# EAGLE board Relay shield (EAGLE 5.10)
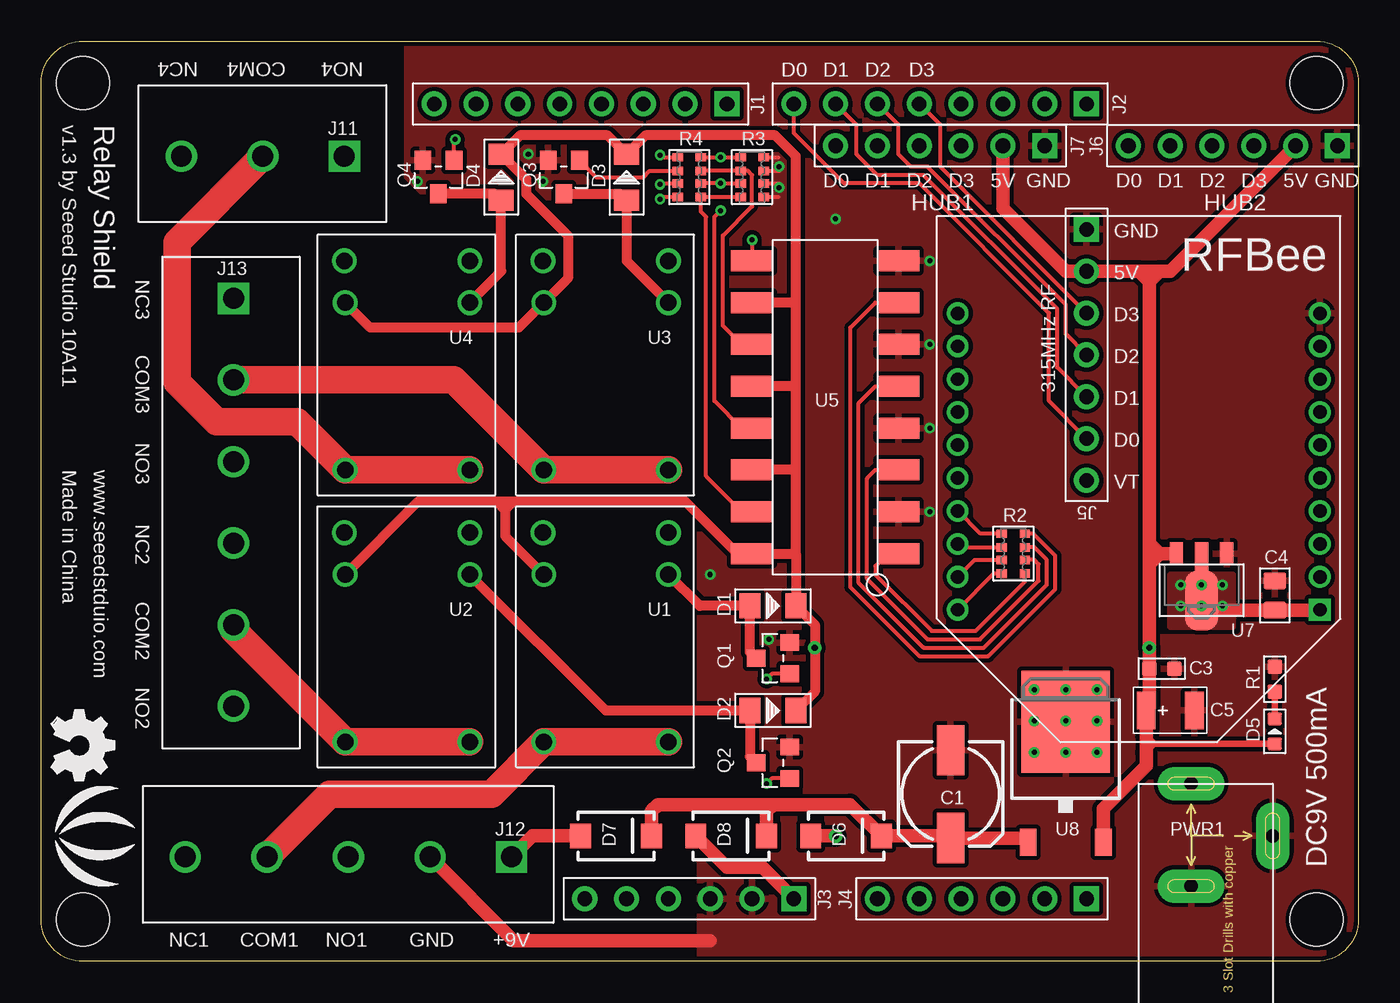
[diagram p0: board, top side]
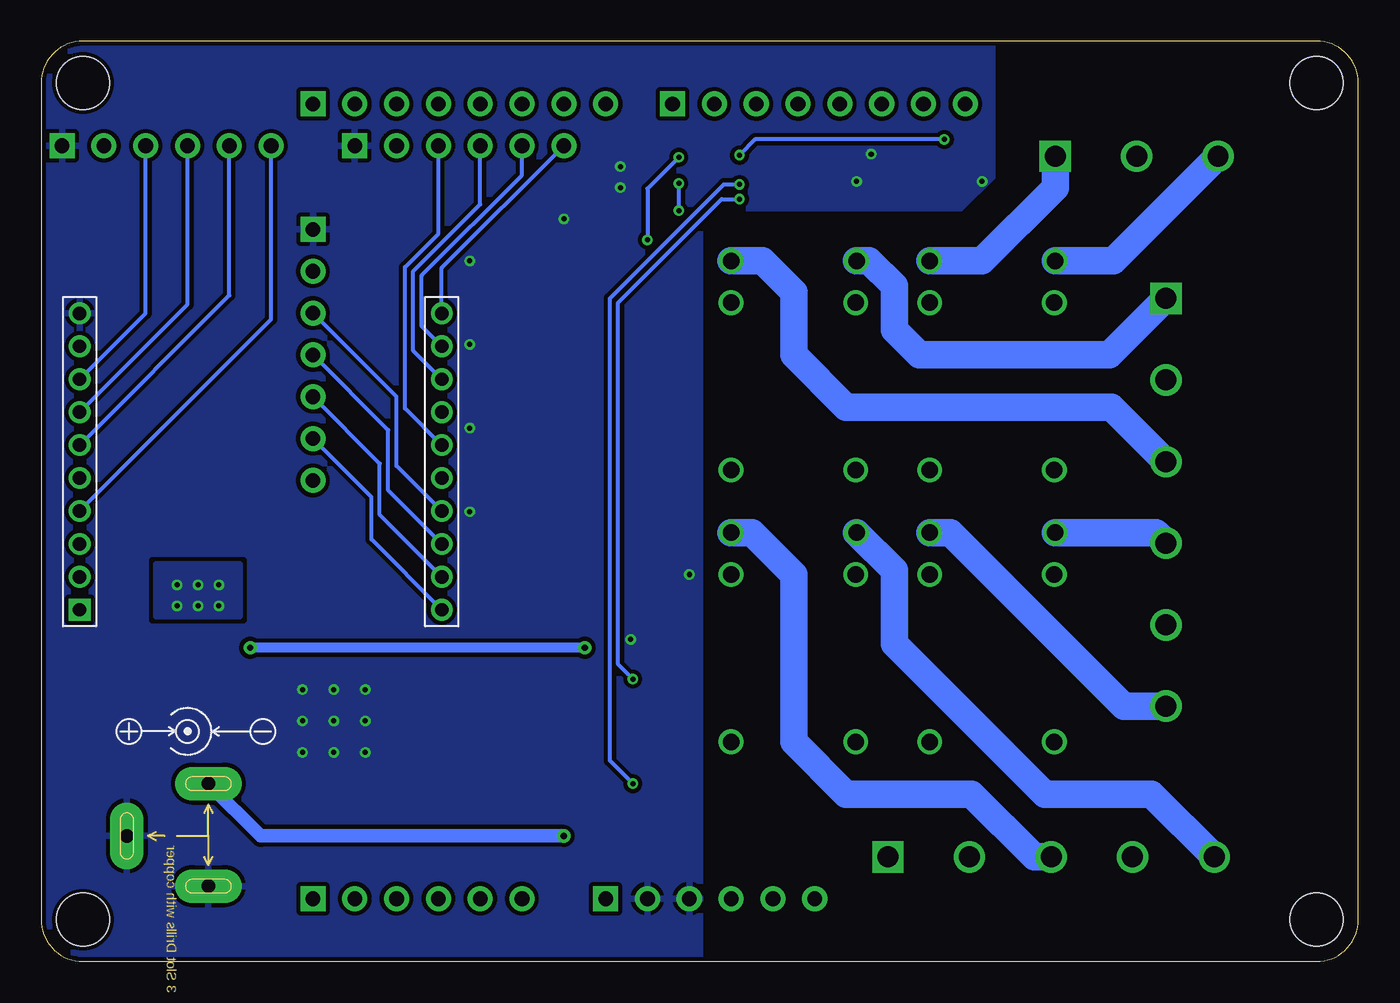
[diagram p1: board, bottom side, seen from below]

Size 80.01 x 55.88 mm. Coordinates in mm from the lower left corner, seen from the top.
Outline: 2.54,55.88 77.47,55.88 arc-90 80.01,53.34 80.01,2.54 arc-90 77.47,0 2.54,0 arc-90 0,2.54 0,53.34 arc-90 2.54,55.88
Copper layers (1*16): Top 0.035mm / dielectric 1.5mm / Bottom 0.035mm
Design rules "SeeedStudio_rule_no_angle_090911 *": minimum track width 6mil, minimum drill 12mil, track to track 6mil, track to pad 6mil, pad to pad 6mil, via to via 6mil, smd to smd 0mil, copper to edge 10mil, drill to drill 10mil, minimum pad ring 10mil, minimum via ring 6mil, stop-mask expansion 2mil, vias tented up to drill 100mil, thermal gap 10mil
Net classes: 0 default: width 0.152 mm, drill 0.305 mm, clearance 0.152 mm
Holes 3.2 mm at 77.47,53.34 2.54,53.34 2.54,2.54 77.47,2.54
tRestrict: area 43.6,46.1 to 44.2,49.1

## Footprints (pad centres in the part's own frame; a part is rotated, then mirrored left to right if it is on the bottom)
ELECTRO-SMD-C-6MM = smd 3.048 x 1.651: + 2.667,0; - -2.667,0
0603 = smd 0.889 x 0.889: 1 -0.762,0; 2 0.762,0
0805 = smd 1.016 x 1.397: 1 -0.889,0; 2 0.889,0
AVX-B = smd 1.143 x 2.286: + -1.46,0; - 1.46,0
D1206 = smd 1.27 x 1.524: + -1.397,0; - 1.397,0
LED-0603 = smd 0.762 x 0.889: + -0.762,0; - 0.762,0
SMA-DIODE = smd 1.27 x 1.47: A -2.15,0; C 2.15,0
CK_1X8 = drill 0.889 pad 1.524 square: 1 0,8.89 | drill 0.889 pad 1.524 round: 2 0,6.35; 3 0,3.81; 4 0,1.27; 5 0,-1.27; 6 0,-3.81; 7 0,-6.35; 8 0,-8.89
CK_1X6 = drill 0.889 pad 1.524 square: 1 0,6.35 | drill 0.889 pad 1.524 round: 2 0,3.81; 3 0,1.27; 4 0,-1.27; 5 0,-3.81; 6 0,-6.35
CK_1X7 = drill 0.889 pad 1.524 square: 1 0,8.89 | drill 0.889 pad 1.524 round: 2 0,6.35; 3 0,3.81; 4 0,1.27; 5 0,-1.27; 6 0,-3.81; 7 0,-6.35
3PIN_TERMINAL = drill 1.27 pad 1.778 square: 1 0,0 | drill 1.27 pad 1.778 round: 2 0,4.95; 3 0,9.893
5PIN_TERMINAL = drill 1.27 pad 1.778 square: 1 0,0 | drill 1.27 pad 1.778 round: 2 0,4.95; 3 0,9.919; 4 0,14.856; 5 0,19.825
6PIN_TERMINAL = drill 1.27 pad 1.778 square: 1 0,0 | drill 1.27 pad 1.778 round: 2 0,4.95; 3 0,9.919; 4 0,14.856; 5 0,19.825; 6 0,24.752
PW-3P-2.5 = drill 0.813 pad 2.032 long: + 3.175,0; -1 -3.048,0; -2 0,-4.953
SOT23 = smd 1.016 x 1.143: 1 -0.95,-1.016; 2 0.95,-1.016; 3 0,1.016
1206-8-3.3X2.4 = smd 0.508 x 0.635: 1 -1.206,-0.699; 2 -0.381,-0.699; 3 0.381,-0.699; 4 1.206,-0.699; 5 1.206,0.699; 6 0.381,0.699; 7 -0.381,0.699; 8 -1.206,0.699
RELAY_6PIN = drill 1 round: COM1 -10.16,7.569; COM2 -10.16,0; NC 2.54,7.62; NO 2.54,0; V+ 0,7.569; V- 0,0
TLP521-4 = smd 2.54 x 1.27: 1 -4.445,8.89; 2 -4.445,6.35; 3 -4.445,3.81; 4 -4.445,1.27; 5 -4.445,-1.27; 6 -4.445,-3.81; 7 -4.445,-6.35; 8 -4.445,-8.89; 9 4.445,-8.89; 10 4.445,-6.35; 11 4.445,-3.81; 12 4.445,-1.27; 13 4.445,1.27; 14 4.445,3.81; 15 4.445,6.35; 16 4.445,8.89
CCBEE-PRO = drill 0.813 square: 1 -11,9 | drill 0.813 round: 2 -11,7; 3 -11,5; 4 -11,3; 5 -11,1; 6 -11,-1; 7 -11,-3; 8 -11,-5; 9 -11,-7; 10 -11,-9; 11 11,-9; 12 11,-7; 13 11,-5; 14 11,-3; 15 11,-1; 16 11,1; 17 11,3; 18 11,5; 19 11,7; 20 11,9
SOT89 = smd 0.8 x 1.4: 1 -1.524,-1.905; 3 1.524,-1.905 | smd 0.8 x 1.9: 2 0,-1.651 | smd 2.032 x 3.65: 4 0,0.94
TO252 = smd 1.016 x 1.651: 1 -2.286,-4.826; 2 2.286,-4.826 | smd 5.4 x 6.2: 3 0,2.5

## Placement (x,y rotation side)
C1  25V_100uF  [ELECTRO-SMD-C-6MM]  55.24,10.16 270 top
C3  100nF  [0603]  68.07,17.78 180 top
C4  10uF  [0805]  74.93,22.23 270 top
C5  10v_10uF  [AVX-B]  68.58,15.24 0 top
D1  LL4148  [D1206]  44.45,21.59 0 top
D2  LL4148  [D1206]  44.45,15.24 0 top
D3  LL4148  [D1206]  35.56,47.62 90 top
D4  LL4148  [D1206]  27.94,47.62 90 top
D5  GREEN  [LED-0603]  74.93,13.97 90 top
D6  1N4004  [SMA-DIODE]  48.9,7.62 0 top
D7  1N4004  [SMA-DIODE]  34.93,7.62 0 top
D8  1N4004  [SMA-DIODE]  41.91,7.62 0 top
J1  2.54-8p-male  [CK_1X8]  32.77,52.07 270 top
J2  2.54-8p-male  [CK_1X8]  54.61,52.07 270 top
J3  2.54-6p-male  [CK_1X6]  39.37,3.81 270 top
J4  2.54-6p-male  [CK_1X6]  57.15,3.81 270 top
J5  DNP  [CK_1X7]  63.5,35.56 0 top
J6  DNP  [CK_1X6]  72.39,49.53 270 top
J7  DNP  [CK_1X6]  54.61,49.53 270 top
J11  3PIN_TERMINAL  [3PIN_TERMINAL]  18.41,48.89 90 top
J12  5PIN_TERMINAL  [5PIN_TERMINAL]  28.57,6.35 90 top
J13  6PIN_TERMINAL  [6PIN_TERMINAL]  11.68,40.26 180 top
LOGO1  LOGO_SILK  [LOGO_SILK]  2.54,7.62 270 top
PWR1  [PW-3P-2.5]  69.85,7.62 90 top
Q1  NPN_9013_SMD  [SOT23]  44.45,18.41 90 top
Q2  NPN_9013_SMD  [SOT23]  44.45,12.07 90 top
Q3  NPN_9013_SMD  [SOT23]  31.75,47.62 180 top
Q4  NPN_9013_SMD  [SOT23]  24.13,47.62 180 top
R1  1.8K  [0603]  74.93,17.14 90 top
R2  1k  [1206-8-3.3X2.4]  59.05,24.77 90 top
R3  10k  [1206-8-3.3X2.4]  43.18,47.62 90 top
R4  3.9k  [1206-8-3.3X2.4]  39.37,47.62 90 top
U1  RELAY_6PIN  [RELAY_6PIN]  38.1,23.5 90 top
U2  RELAY_6PIN  [RELAY_6PIN]  26.04,23.5 90 top
U3  RELAY_6PIN  [RELAY_6PIN]  38.1,40 90 top
U4  RELAY_6PIN  [RELAY_6PIN]  26.04,40 90 top
U5  TLP521-4  [TLP521-4]  47.62,33.65 180 top
U6  Bee Socket  [CCBEE-PRO]  66.67,30.35 180 top
U7  1117-3.3v  [SOT89]  70.48,22.86 180 top
U8  78M05  [TO252]  62.23,12.07 0 top
U$2  [OSHW_FILLX150_NOTEXT]  0.63,15.24 270 top

## Library data of the parts
C1 C3-C5 D1-D5 Q1-Q4 R1-R4 = Discrete
D6-D8 = SparkFun
J1 J2 = CONNECTER1
J3-J7 = CONNECTER
J11-J13 U1-U5 = Seeed
LOGO1 U$2 = logo
PWR1 = Connector
U6 = EXT_moudle
U7 U8 = IC

## Nets
+3.3V: C4.2 U6.1 U7.2 U7.4
+5V: C3.2 C5.+ D1.- D2.- D3.- D4.- D5.+ J5.2 J6.2 J7.2 U1.V+ U2.V+ U3.V+ U4.V+ U5.10 U5.12 U5.14 U5.16 U7.3 U8.2
COM1: J12.4 U1.COM1 U1.COM2
COM2: J13.5 U2.COM1 U2.COM2
COM3: J13.2 U3.COM1 U3.COM2
COM4: J11.2 U4.COM1 U4.COM2
D0: J2.8 J5.6 R2.8 U6.20
D1: J2.7 J5.5 R2.7 U6.19
D2: J2.6 J5.4 R2.6 U6.18
D3: J2.5 J5.3 R2.5 U6.17
DOUT1: R3.8 R4.1 U5.15
DOUT2: R3.7 R4.2 U5.13
DOUT3: R3.6 R4.3 U5.11
DOUT4: R3.5 R4.4 U5.9
GND: C1.- C3.1 C4.1 C5.- J3.2 J3.3 J5.1 J6.1 J7.1 J12.2 PWR1.-1 PWR1.-2 Q1.2 Q2.2 Q3.2 Q4.2 R1.2 R3.1 R3.2 R3.3 R3.4 U5.2 U5.4 U5.6 U5.8 U6.10 U7.1 U8.3
JACK_9V: D6.A PWR1.+
N$1: J7.3 U6.15
N$2: J7.4 U6.13
N$3: R2.1 U5.1
N$4: J7.5 U6.12
N$5: D8.A J3.1
N$6: Q4.1 R4.5
N$7: D1.+ Q1.3 U1.V-
N$8: J7.6 U6.11
N$11: Q3.1 R4.6
N$12: D2.+ Q2.3 U2.V-
N$13: R2.2 U5.3
N$15: R2.3 U5.5
N$17: Q2.1 R4.7
N$18: D3.+ Q3.3 U3.V-
N$20: R2.4 U5.7
N$23: Q1.1 R4.8
N$24: D4.+ Q4.3 U4.V-
N$25: D5.- R1.1
N$31: J6.6 U6.4
N$34: J6.3 U6.8
N$35: J6.4 U6.7
N$36: J6.5 U6.6
NC1: J12.5 U1.NC
NC2: J13.4 U2.NC
NC3: J13.1 U3.NC
NC4: J11.3 U4.NC
NO1: J12.3 U1.NO
NO2: J13.6 U2.NO
NO3: J13.3 U3.NO
NO4: J11.1 U4.NO
TER_9V: D7.A J12.1
VCC: C1.+ D6.C D7.C D8.C U8.1
VT: J5.7

## Tracks (layer width: path | path; a pad name or v marks a point on that pad's centre or on a via)
+3.3V  (via drill 0.3 pad 0.64)
  Top 0.813: U7.2 v70.48,22.86 U7.4 71.07,21.34 C4.2 77.66,21.34 U6.1
  other vias: 71.75,22.86 69.21,22.86 69.21,21.59 70.48,21.59 71.75,21.59
  pour Bottom (isolate 0.254): 67.94,24.13 73.02,24.13 73.02,20.96 67.94,20.96
  pour Top (isolate 0.254, no thermals): 68.58,23.5 72.39,23.5 72.39,20.32 68.58,20.32
+5V  (via drill 0.38 pad 0.81)
  Top 0.406: 67.63,13.21 D5.+ | 67.12,13.72 67.63,13.21 | 67.12,12.7 67.63,13.21
  Top 0.61: U4.V+ 19.99,38.48 29.01,38.48 U3.V+ 32,41.48 32,44.07 29.46,46.61 29.46,47.5 D4.- 29.08,50.16 34.42,50.16 D3.- 36.7,50.16 44.58,50.16 45.85,48.89 45.85,40 | 45.85,24.77 D1.- 46.99,20.45 v46.99,19.05 46.99,16.38 D2.- | 45.85,24.77 45.85,29.84 | 45.85,29.84 45.85,34.92 | 45.85,34.92 45.85,40 | 45.85,40 U5.10 | 45.85,34.92 U5.12 | 45.85,29.84 U5.14 | 45.85,24.77 U5.16 42.29,24.77 39.12,27.94 28.7,27.94 | U2.V+ 22.91,27.94 27.69,27.94 | 27.69,27.94 28.7,27.94 | U1.V+ 28.19,25.83 28.19,27.43 | 27.69,27.94 28.19,27.43 | 28.7,27.94 28.19,27.43
  Top 0.813: U8.2 64.52,9.27 67.12,11.88 67.12,12.7 67.12,13.72 C5.+ 67.31,15.43 C3.2 v67.31,19.05 67.31,24.13 | J7.2 58.42,45.72 62.23,41.91 J5.2 66.67,41.91 | J6.2 68.58,41.91 67.94,41.91 | 66.67,41.91 67.94,41.91 | 67.31,24.13 67.31,25.4 | 67.31,25.4 67.31,41.27 | 67.31,41.27 66.67,41.91 | 67.31,41.27 67.94,41.91 | 67.94,24.77 U7.3 | 67.31,25.4 67.94,24.77 | 67.31,24.13 67.94,24.77
  Bottom 0.61: v46.99,19.05 v67.31,19.05
COM1
  Top 1.676: U1.COM2 U1.COM1 27.36,10.16 17.53,10.16 J12.4
COM2
  Top 1.676: U2.COM2 U2.COM1 11.68,20.12 J13.5
COM3
  Top 1.676: U3.COM2 U3.COM1 25.07,35.31 J13.2
COM4
  Top 1.676: J11.2 8.25,43.68 8.25,35.18 10.67,32.77 15.55,32.77 U4.COM1 U4.COM2
D0
  Top 0.254: R2.8 57.88,23.56 U6.20 | J5.6 61.21,34.04 61.21,39.37 53.34,47.24 48.77,47.24 45.72,50.29 J2.8
  Bottom 0.254: J5.6 59.94,28.19 59.94,25.62 U6.20
D1
  Top 0.254: R2.7 56.71,24.38 U6.19 | J5.5 61.72,36.07 61.72,39.62 53.59,47.75 50.8,47.75 49.53,49.02 49.53,50.8 J2.7
  Bottom 0.254: J5.5 59.44,30.23 59.44,27.11 U6.19
D2
  Top 0.254: R2.6 55.88,25.15 U6.18 | J5.4 62.23,38.1 62.23,39.88 53.85,48.26 52.83,48.26 52.07,49.02 52.07,50.8 J2.6
  Bottom 0.254: J5.4 58.93,32.26 58.93,28.61 U6.18
D3
  Top 0.254: R2.5 57.06,25.97 U6.17 | J5.3 54.61,48.26 54.61,50.8 J2.5
  Bottom 0.254: J5.3 58.42,34.29 58.42,30.1 U6.17
DOUT1
  Top 0.254: U5.15 42.55,27.3 40.39,29.46 40.39,45.21 40.07,45.53 R4.1 R3.8
DOUT2  (via drill 0.3 pad 0.64)
  Top 0.254: R4.2 v41.27,47.24 R3.7 | U5.13 42.55,32.38 40.89,34.04 40.89,45.21 v41.27,45.59
  Bottom 0.254: v41.27,45.59 v41.27,47.24
DOUT3
  Top 0.254: U5.11 42.55,37.46 41.4,38.61 41.4,44.07 43.18,45.85 43.18,47.75 42.93,48.01 R3.6 R4.3
DOUT4  (via drill 0.3 pad 0.64)
  Top 0.254: R3.5 v41.27,48.83 R4.4 | v43.18,43.81 U5.9
  Bottom 0.254: v43.18,43.81 43.18,46.93 v41.27,48.83
GND  (via drill 0.3 pad 0.64)
  Top 0.254: R3.1 44.77,46.42 | R3.2 44.83,47.24 | R3.3 44.83,48.01 | R3.4 44.77,48.83
  Top 0.813: J12.2 28.71,1.27 40.64,1.27
  other vias: 29.59,49.02 30.48,47.37 22.86,47.37 48.26,45.08 53.98,37.46 53.98,27.3 53.98,42.54 53.98,32.38 44.83,48.26 44.83,46.99 44.2,19.56 40.64,23.5 62.23,12.7 62.23,14.61 62.23,16.51 60.33,16.51 60.33,14.61 60.33,12.7 64.13,12.7 64.13,14.61 64.13,16.51
  pour Bottom: -6.99,54.61 -5.71,54.61 -5.71,53.34 -6.99,53.34
  pour Top (isolate 0.254, rank 6): 22.23,55.88 80.01,55.88 80.01,0 40.01,0 40.01,45.72 24.13,45.72 22.23,47.62
  pour Bottom (isolate 0.254, rank 6): 22.23,55.88 80.01,55.88 80.01,0 40.01,0 40.01,45.72 24.13,45.72 22.23,47.62
JACK_9V  (via drill 0.38 pad 0.81)
  Top 0.813: D6.A v48.26,7.62
  Bottom 0.813: PWR1.+ 66.67,7.62 v48.26,7.62
N$1
  Bottom 0.254: J7.3 55.88,44.2 57.91,42.16 57.91,33.59 U6.15
N$2
  Bottom 0.254: J7.4 53.34,45.97 57.4,41.91 57.4,37.08 U6.13
N$3
  Top 0.254: R2.1 59.75,23.05 56.77,20.07 54.1,20.07 50.67,23.5 50.67,24 51.44,24.77 U5.1
N$4
  Bottom 0.254: J7.5 50.8,47.75 56.9,41.66 56.9,38.57 U6.12
N$5
  Top 0.813: J3.1 43.81,5.71 41.66,5.71 D8.A
N$6  (via drill 0.3 pad 0.64)
  Top 0.254: R4.5 37.72,48.83 v37.59,48.96 | v25.15,49.91 25.08,49.84 Q4.1
  Bottom 0.254: v25.15,49.91 36.64,49.91 v37.59,48.96
N$7
  Top 0.61: U1.V- 40.01,21.59 D1.+ 43.05,18.8 Q1.3
N$8
  Bottom 0.254: J7.6 55.68,42.11 U6.11
N$11
  Top 0.254: R4.6 36.96,48.01 36.58,47.62 33.72,47.62 Q3.1
N$12
  Top 0.61: U2.V- 34.29,15.24 D2.+ 43.05,12.45 Q2.3
N$13
  Top 0.254: R2.2 60.33,24.38 60.58,24.13 60.58,23.11 57.02,19.56 53.85,19.56 50.16,23.24 50.16,29.34 50.67,29.84 U5.3
N$15
  Top 0.254: R2.3 60.33,25.15 61.09,24.38 61.09,22.86 57.28,19.05 53.59,19.05 49.66,22.99 49.66,33.91 50.67,34.92 U5.5
N$17  (via drill 0.3 pad 0.64)
  Top 0.254: R4.7 37.66,47.24 v37.59,47.18 | v44.07,10.79 44.39,11.12 Q2.1
  Bottom 0.254: v37.59,47.18 38.54,47.18 45.47,40.26 45.47,12.19 v44.07,10.79
N$18
  Top 0.61: Q3.3 35.18,46.61 D3.+ 35.56,42.54 U3.V-
N$20
  Top 0.254: R2.4 60.26,25.97 61.6,24.64 61.6,22.61 57.53,18.54 53.34,18.54 49.15,22.73 49.15,38.48 50.67,40 U5.7
N$23  (via drill 0.3 pad 0.64)
  Top 0.254: R4.8 37.72,46.42 v37.59,46.29 | Q1.1 44.39,17.46 v44.07,17.14
  Bottom 0.254: v37.59,46.29 38.67,46.29 44.96,40 44.96,18.03 v44.07,17.14
N$24
  Top 0.61: Q4.3 27.56,46.61 D4.+ 27.94,41.91 U4.V-
N$25
  Top 0.406: D5.- R1.1
N$31
  Bottom 0.254: J6.6 66.04,38.99 U6.4
N$34
  Bottom 0.254: J6.3 73.66,39.37 U6.8
N$35
  Bottom 0.254: J6.4 71.12,39.91 U6.7
N$36
  Bottom 0.254: J6.5 68.58,40.45 U6.6
NC1
  Bottom 1.676: U1.NC 28.19,23.75 28.19,19.3 19.05,10.16 12.56,10.16 J12.5
NC2
  Bottom 1.676: U2.NC 12.32,26.04 J13.4
NC3
  Bottom 1.676: U3.NC 29.72,42.54 28.19,41.02 28.19,38.35 26.67,36.83 15.11,36.83 J13.1
NC4
  Bottom 1.676: U4.NC 14.87,42.54 J11.3
NO1
  Bottom 1.676: U1.NO 36.83,26.04 34.29,23.5 34.29,13.34 31.12,10.16 23.5,10.16 19.69,6.35 J12.3
NO2
  Bottom 1.676: U2.NO 24.77,26.04 14.24,15.51 J13.6
NO3
  Bottom 1.676: J13.3 15,33.65 31.12,33.65 34.29,36.83 34.29,40.64 36.2,42.54 U3.NO
NO4
  Bottom 1.676: U4.NO 22.86,42.54 18.41,46.99 J11.1
TER_9V
  Top 0.813: J12.1 29.84,7.62 D7.A
VCC
  Top 0.813: D7.C 37.08,9.13 37.47,9.53 43.69,9.53 | 44.06,9.13 D8.C | 44.45,9.53 44.06,9.13 | 44.45,9.53 49.14,9.53 D6.C 55.12,7.62 C1.+ 59.69,7.49 U8.1 | 44.06,9.13 44.06,9.15 43.69,9.53 | 43.69,9.53 44.45,9.53

## Text on the board
tPlace: NC4 | COM4 | NO4 | D0 | D1 | D2 | D3 | v1.3 by Seeed Studio 10A11 | Relay Shield | D0 | D1 | D2 | D3 | 5V | GND | D0 | D1 | D2 | D3 | 5V | GND | HUB1 | HUB2 | GND | NC3 | 5V | RFBee | D3 | COM3 | D2 | 315MHz RF | D1 | NO3 | D0 | Made in China | www.seeedstduio.com | VT | NC2 | COM2 | NO2 | DC9V 500mA | NC1 | COM1 | NO1 | GND | +9V